# EAGLE board CameraController (EAGLE 6.5.0)
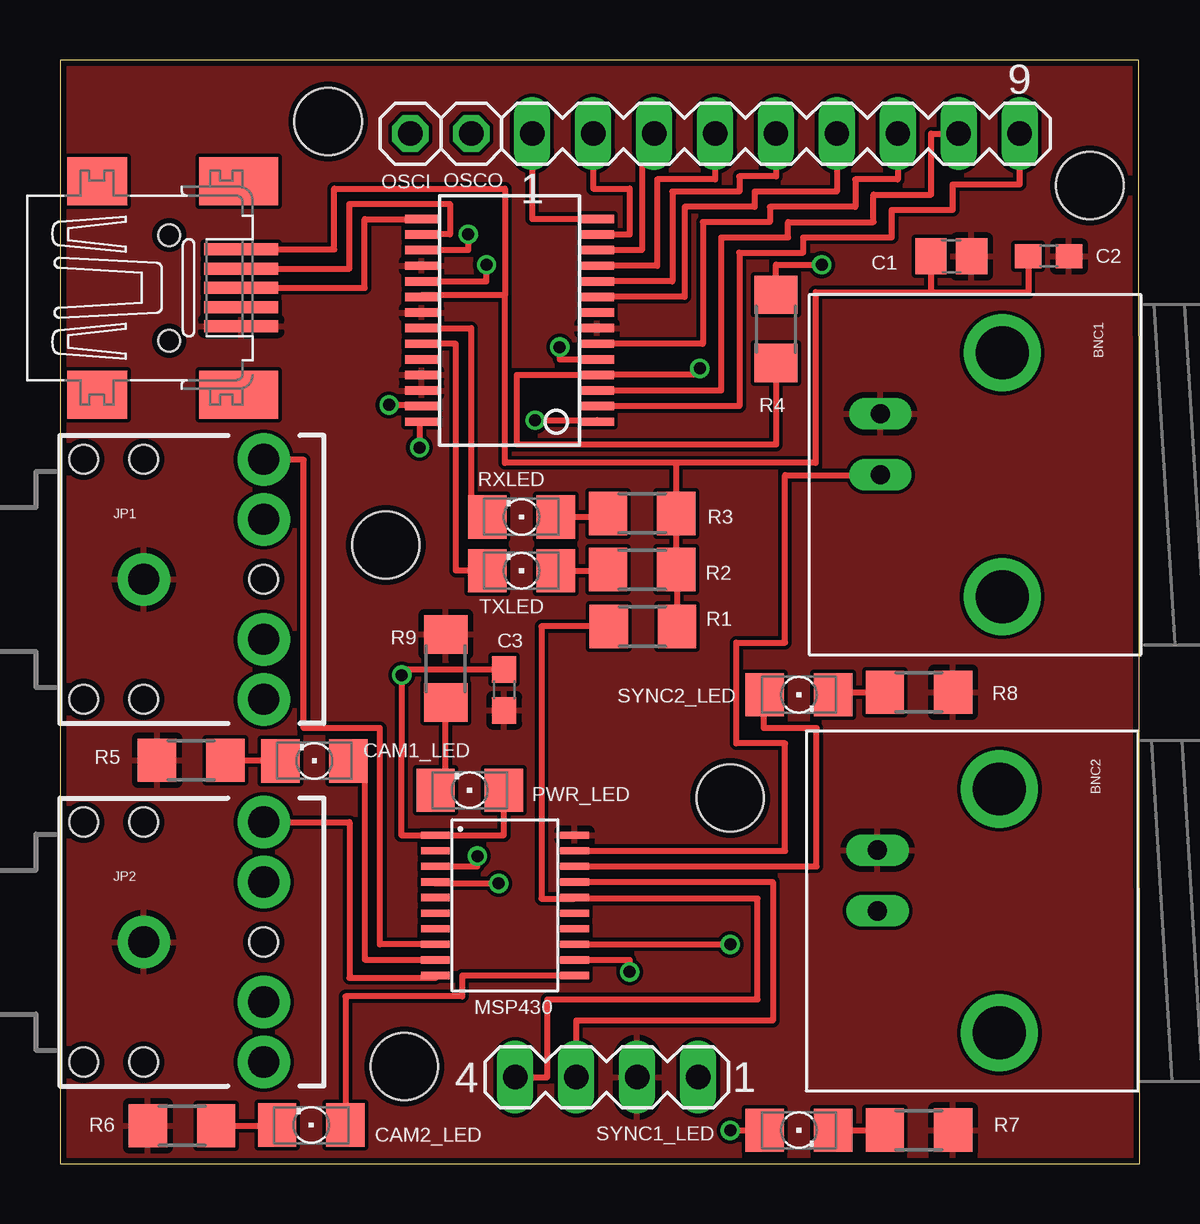
[diagram p0: board, top side]
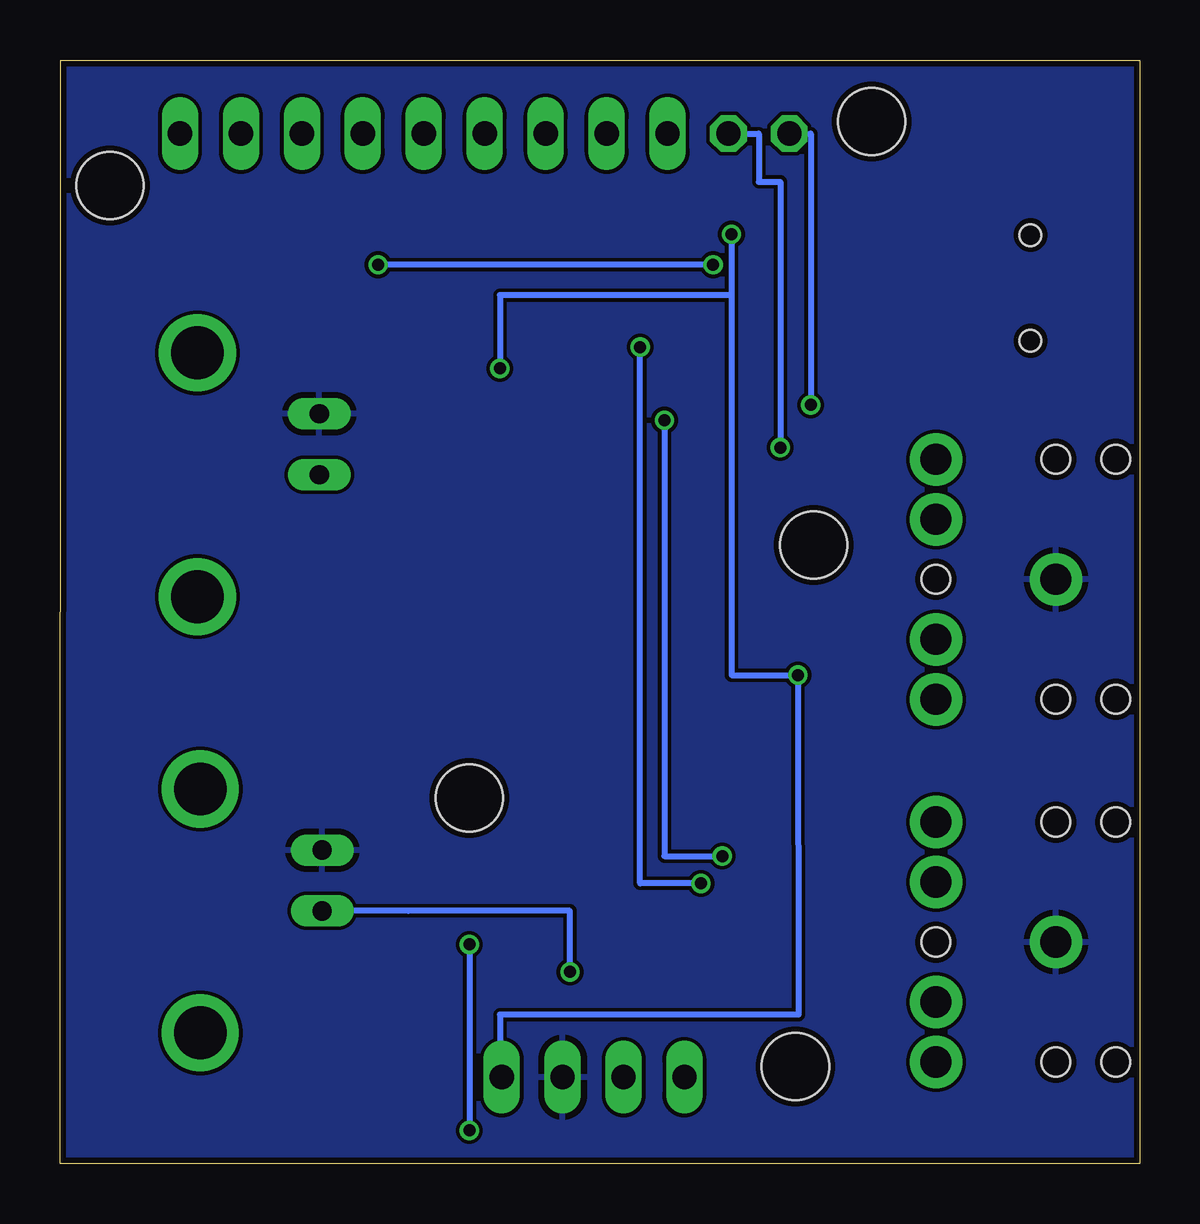
[diagram p1: board, bottom side, seen from below]

Size 45.01 x 46 mm. Coordinates in mm from the lower left corner, seen from the top.
Outline: 0,0 45.01,0 44.98,46 0,46 0,0
Copper layers (1*16): Top 0.035mm / dielectric 1.5mm / Bottom 0.035mm
Design rules "Seeed_DRU": minimum track width 6mil, minimum drill 12mil, track to track 6mil, track to pad 6mil, pad to pad 6mil, via to via 6mil, smd to smd 0mil, copper to edge 10mil, drill to drill 10mil, minimum pad ring 10mil, minimum via ring 6mil, stop-mask expansion 2mil, vias tented up to drill 100mil, thermal gap 10mil
Holes 2.8 mm at 14.35,4.06 11.18,43.43 42.93,40.77 13.59,25.78 27.94,15.24

## Footprints (pad centres in the part's own frame; a part is rotated, then mirrored left to right if it is on the bottom)
BNC = drill 2.2: 3 -5.08,5.08; 4 5.08,5.08 | drill 0.8 long: GND -2.54,0; S 0,0
C0805 = smd 1.3 x 1.5: 1 -0.85,0; 2 0.85,0
C0603 = smd 1.1 x 1: 1 -0.85,0; 2 0.85,0
LED_1206 = smd 1.6 x 1.803: A -1.422,0; C 1.422,0
AUDIO-JACK = drill 1.3 pad 2.184: RING 5,5; RSH 5,2.5; SLEEVE 0,0; TIP 5,-5; TSH 5,-2.5 | hole 1.2: 0,5; -2.5,5; -2.5,-5; 0,-5; 5,0
20_PIN = smd 0.3 x 1.2: 1 -2.925,-2.9; 2 -2.275,-2.9; 3 -1.625,-2.9; 4 -0.975,-2.9; 5 -0.325,-2.9; 6 0.325,-2.9; 7 0.975,-2.9; 8 1.625,-2.9; 9 2.275,-2.9; 10 2.925,-2.9; 11 2.925,2.9; 12 2.275,2.9; 13 1.625,2.9; 14 0.975,2.9; 15 0.325,2.9; 16 -0.325,2.9; 17 -0.975,2.9; 18 -1.625,2.9; 19 -2.275,2.9; 20 -2.925,2.9
MA09-1 = drill 1.016 long: 1 -10.16,0; 2 -7.62,0; 3 -5.08,0; 4 -2.54,0; 5 0,0; 6 2.54,0; 7 5.08,0; 8 7.62,0; 9 10.16,0
1X01 = drill 1.016 octagon: 1 0,0
MA04-1 = drill 1.016 long: 1 -3.81,0; 2 -1.27,0; 3 1.27,0; 4 3.81,0
R1206 = smd 1.6 x 1.803: 1 -1.422,0; 2 1.422,0
SSOP28DB = smd 0.348 x 1.397: 1 -4.225,-3.656; 2 -3.575,-3.656; 3 -2.925,-3.656; 4 -2.275,-3.656; 5 -1.625,-3.656; 6 -0.975,-3.656; 7 -0.325,-3.656; 8 0.325,-3.656; 9 0.975,-3.656; 10 1.625,-3.656; 11 2.275,-3.656; 12 2.925,-3.656; 13 3.575,-3.656; 14 4.225,-3.656; 15 4.225,3.656; 16 3.575,3.656; 17 2.925,3.656; 18 2.275,3.656; 19 1.625,3.656; 20 0.975,3.656; 21 0.325,3.656; 22 -0.325,3.656; 23 -0.975,3.656; 24 -1.625,3.656; 25 -2.275,3.656; 26 -2.925,3.656; 27 -3.575,3.656; 28 -4.225,3.656
32005-201 = smd 3.1 x 0.5: 1 3,1.6; 2 3,0.8; 3 3,0; 4 3,-0.8; 5 3,-1.6 | smd 2.5 x 2: M1 -3,-4.45; M2 -3,4.45 | smd 3.3 x 2: M3 2.9,4.45; M4 2.9,-4.45 | hole 0.9: 0,2.2; 0,-2.2

## Placement (x,y rotation side)
BNC1  BNCPTH  [BNC]  34.2,28.72 270 top
BNC2  BNCPTH  [BNC]  34.08,10.54 270 top
C1  10uF  [C0805]  37.15,37.82 0 top
C2  .1uF  [C0603]  41.21,37.82 0 top
C3  .1uF  [C0603]  18.51,19.75 270 top
CAM1_LED  [LED_1206]  10.6,16.79 180 top
CAM2_LED  [LED_1206]  10.47,1.62 180 top
JP1  [AUDIO-JACK]  3.49,24.36 0 top
JP2  [AUDIO-JACK]  3.49,9.24 0 top
MSP430  [20_PIN]  18.55,10.77 270 top
NC  [MA09-1]  29.84,42.93 0 top
OSCI  [1X01]  14.61,42.93 0 top
OSCO  [1X01]  17.14,42.93 0 top
PIN_HEADER  [MA04-1]  22.79,3.62 180 top
PWR_LED  [LED_1206]  17.08,15.57 180 top
R1  [R1206]  24.3,22.39 0 top
R2  [R1206]  24.26,24.77 180 top
R3  [R1206]  24.26,27.1 180 top
R4  [R1206]  29.85,34.79 90 top
R5  [R1206]  5.47,16.82 180 top
R6  [R1206]  5.09,1.59 180 top
R7  [R1206]  35.81,1.41 0 top
R8  [R1206]  35.81,19.65 0 top
R9  [R1206]  16.08,20.64 90 top
RXLED  [LED_1206]  19.24,26.96 180 top
SYNC1_LED  [LED_1206]  30.8,1.41 0 top
SYNC2_LED  [LED_1206]  30.8,19.55 0 top
TXLED  [LED_1206]  19.24,24.71 180 top
U1  FT232RLSSOP  [SSOP28DB]  18.74,35.15 90 top
USB_RCPT  MINI-USB-32005-201  [32005-201]  4.55,36.5 0 top

## Library data of the parts
BNC1 BNC2 = SparkFun-Connectors
C1-C3 JP1 JP2 = CameraController
CAM1_LED CAM2_LED PWR_LED RXLED SYNC1_LED SYNC2_LED TXLED = CameraController; SPICEMODEL: NONE; SPICEPREFIX: D; SPICETYPE: diode
MSP430 OSCI OSCO R1-R9 = BiphasicBoard
NC PIN_HEADER = con-lstb; OC_FARNELL: unknown; OC_NEWARK: unknown
U1 = SparkFun-DigitalIC; PROD_ID: IC-00870
USB_RCPT = con-cypressindustries; OC_FARNELL: unknown; OC_NEWARK: unknown

## Nets
3V3: C3.1 MSP430.1 PIN_HEADER.1 PWR_LED.A R4.1 U1.4 U1.17
CAM1: JP1.RING MSP430.8
CAM1_LED: CAM1_LED.C R5.1
CAM2: JP2.RING MSP430.10
CTS: NC.4 U1.11
D+: U1.15 USB_RCPT.3
D-: U1.16 USB_RCPT.2
DCD: NC.5 U1.10
DSR: NC.6 U1.9
DTR: NC.9 U1.2
GND: BNC1.GND BNC2.GND C1.2 C2.2 C3.2 JP1.SLEEVE JP2.SLEEVE MSP430.20 PIN_HEADER.2 R5.2 R6.2 R7.2 R8.2 R9.2 U1.7 U1.18 U1.21 U1.25 U1.26 USB_RCPT.5
LED1: CAM1_LED.A MSP430.9
LED2: CAM2_LED.A MSP430.11
N$1: R2.2 TXLED.A
N$2: RXLED.C U1.22
N$3: R3.2 RXLED.A
N$4: R4.2 U1.19
N$5: CAM2_LED.C R6.1
N$6: MSP430.13 SYNC1_LED.A
N$7: R7.1 SYNC1_LED.C
N$8: MSP430.18 SYNC2_LED.A
N$9: R8.1 SYNC2_LED.C
N$10: PWR_LED.C R9.1
N$11: TXLED.C U1.23
OSCI: OSCI.1 U1.27
OSCO: OSCO.1 U1.28
PWREN: NC.1 U1.14
RI: NC.7 U1.6
RST: MSP430.16 PIN_HEADER.4 R1.1
RTS: NC.8 U1.3
RXD: MSP430.4 U1.5
SLEEP: NC.3 U1.12
SYNC1: BNC2.S MSP430.12
SYNC2: BNC1.S MSP430.19
TEST: MSP430.17 PIN_HEADER.3
TXD: MSP430.3 U1.1
TXDEN: NC.2 U1.13
VCC: C1.1 C2.1 R1.2 R2.1 R3.1 U1.20 USB_RCPT.1

## Tracks (layer width: path | path; a pad name or v marks a point on that pad's centre or on a via)
3V3  (via drill 0.5)
  Top 0.254: R4.1 29.85,29.97 19.05,29.97 19.05,32.87 U1.4 26.67,32.87 v26.67,33.15 | C3.1 14.25,20.6 v14.25,20.37 14.22,13.7 MSP430.1 18.5,13.7 PWR_LED.A | v17.02,38.73 17.02,38.07 U1.17
  Bottom 0.254: v26.67,33.15 26.67,36.2 17.02,36.2 v17.02,38.73 17.02,20.37 v14.25,20.37 14.22,6.22 26.67,6.22 26.67,3.62 PIN_HEADER.1
CAM1
  Top 0.254: MSP430.8 13.34,9.15 13.34,18.16 10.16,18.16 10.16,29.34 8.49,29.34 JP1.RING
CAM1_LED
  Top 0.254: R5.1 9.18,16.82 CAM1_LED.C
CAM2
  Top 0.254: JP2.RING 12.06,14.24 12.06,7.75 15.64,7.75 MSP430.10
CTS
  Top 0.254: NC.4 27.3,41.02 24.89,41.02 24.89,37.42 U1.11
D+
  Top 0.254: USB_RCPT.3 12.7,36.5 12.7,39.37 U1.15
D-
  Top 0.254: U1.16 15.08,38.73 16.26,38.73 16.26,40.01 12.06,40.01 12.06,37.3 USB_RCPT.2
DCD
  Top 0.254: NC.5 29.84,41.15 28.32,41.15 28.32,40.51 25.53,40.51 25.53,36.77 U1.10
DSR
  Top 0.254: NC.6 32.38,40.51 28.96,40.51 28.96,39.88 26.04,39.88 26.04,36.12 U1.9
DTR
  Top 0.254: U1.2 28.32,31.57 28.32,37.97 30.99,37.97 30.99,38.61 34.67,38.61 34.67,39.75 37.21,39.75 37.21,40.82 40.01,40.82 NC.9
GND
  pour Top: 0,0 44.96,0 44.96,45.97 0,45.97
  pour Bottom: 0,0 44.96,0 44.96,45.97 0,45.97
LED1
  Top 0.254: CAM1_LED.A 12.7,16.79 12.7,8.51 MSP430.9
LED2
  Top 0.254: MSP430.11 16.76,7.85 16.76,6.99 11.9,6.99 CAM2_LED.A
N$1
  Top 0.254: TXLED.A 22.84,24.71 R2.2
N$2
  Top 0.254: U1.22 17.14,34.82 17.14,26.92 17.82,26.92 RXLED.C
N$3
  Top 0.254: RXLED.A 22.84,26.96 R3.2
N$4  (via drill 0.5)
  Top 0.254: U1.19 17.78,36.77 v17.78,37.47 | R4.2 29.85,37.47 v31.75,37.47
  Bottom 0.254: v17.78,37.47 v31.75,37.47
N$5
  Top 0.254: CAM2_LED.C 9.05,1.59 R6.1
N$6  (via drill 0.5)
  Top 0.254: MSP430.13 v27.94,9.14 | v27.94,1.4 v27.94,1.41 SYNC1_LED.A
  Bottom 0.254: v27.94,9.14 v27.94,1.4
N$7
  Top 0.254: SYNC1_LED.C R7.1
N$8
  Top 0.254: MSP430.18 31.54,12.4 31.54,18.16 29.34,18.16 29.34,19.55 SYNC2_LED.A
N$9
  Top 0.254: SYNC2_LED.C 32.22,19.65 R8.1
N$10
  Top 0.254: PWR_LED.C 16.08,15.57 R9.1
N$11
  Top 0.254: TXLED.C 16.51,24.71 16.51,34.16 U1.23
OSCI  (via drill 0.5)
  Top 0.254: v13.72,31.62 15.08,31.62 U1.27
  Bottom 0.254: OSCI.1 13.72,42.93 v13.72,31.62
OSCO  (via drill 0.5)
  Top 0.254: U1.28 14.99,30.92 v14.99,29.84
  Bottom 0.254: OSCO.1 15.88,42.93 15.88,40.92 14.99,40.92 v14.99,29.84
PWREN
  Top 0.254: NC.1 19.68,39.37 U1.14
RI
  Top 0.254: NC.7 34.92,41.02 33.15,41.02 33.15,39.88 29.59,39.88 29.59,39.24 26.8,39.24 26.8,34.17 U1.6
RST
  Top 0.254: PIN_HEADER.4 20.32,3.62 20.32,6.86 29.08,6.86 29.08,11.05 21.45,11.05 | R1.1 20.07,22.39 20.07,11.05 21.45,11.05 | 21.45,11.05 MSP430.16
RTS
  Top 0.254: U1.3 27.56,32.22 27.56,38.61 30.35,38.61 30.35,39.24 33.91,39.24 33.91,40.39 36.32,40.39 36.32,42.93 NC.8
RXD  (via drill 0.5)
  Top 0.254: v20.83,34.04 20.83,33.52 U1.5 | MSP430.4 15.64,11.68 v18.29,11.68
  Bottom 0.254: v18.29,11.68 20.83,11.68 v20.83,34.04
SLEEP
  Top 0.254: U1.12 24.26,38.07 24.26,42.93 NC.3
SYNC1  (via drill 0.5)
  Top 0.254: MSP430.12 23.75,8.5 v23.75,8
  Bottom 0.254: v23.75,8 23.75,10.54 30.48,10.54 BNC2.S
SYNC2
  Top 0.254: MSP430.19 30.23,13.05 30.23,17.53 28.19,17.53 28.19,21.72 30.23,21.72 30.23,28.7 34.2,28.7 BNC1.S
TEST
  Top 0.254: MSP430.17 29.72,11.75 29.72,5.97 21.52,5.97 PIN_HEADER.3
TXD  (via drill 0.5)
  Top 0.254: MSP430.3 17.4,12.4 v17.4,12.83 | v19.81,30.99 22.39,30.99 U1.1
  Bottom 0.254: v19.81,30.99 19.81,12.83 v17.4,12.83
TXDEN
  Top 0.254: NC.2 22.23,40.64 23.75,40.64 23.75,38.72 U1.13
VCC
  Top 0.254: 18.54,36.2 18.54,40.64 11.43,40.64 11.43,38.1 USB_RCPT.1 | 18.54,36.2 15.08,36.2 U1.20 | 25.69,29.21 31.5,29.21 31.5,36.32 36.3,36.32 | 25.69,29.21 R3.1 R2.1 25.72,24.77 R1.2 | 25.69,29.21 18.54,29.21 18.54,36.2 | 36.3,36.32 40.36,36.32 C2.1 | C1.1 36.3,36.32

## Text on the board
bDocu: Camera Controller / Version 2 / Mini USB Input / 2 Audio Jacks, 2 BNC / Kemere Lab / by Tam Vu